# Altium PCB NODEMCU_DEVKIT_V1.0.PcbDoc
Units mil, origin at the board's own origin, x right, y up, seen from the top; angles counter-clockwise.
Board outline 1000 x 1900 mil, 2 copper layers (Top Layer, Bottom Layer); 34 components, 41 nets, 160 pads, 243 vias.
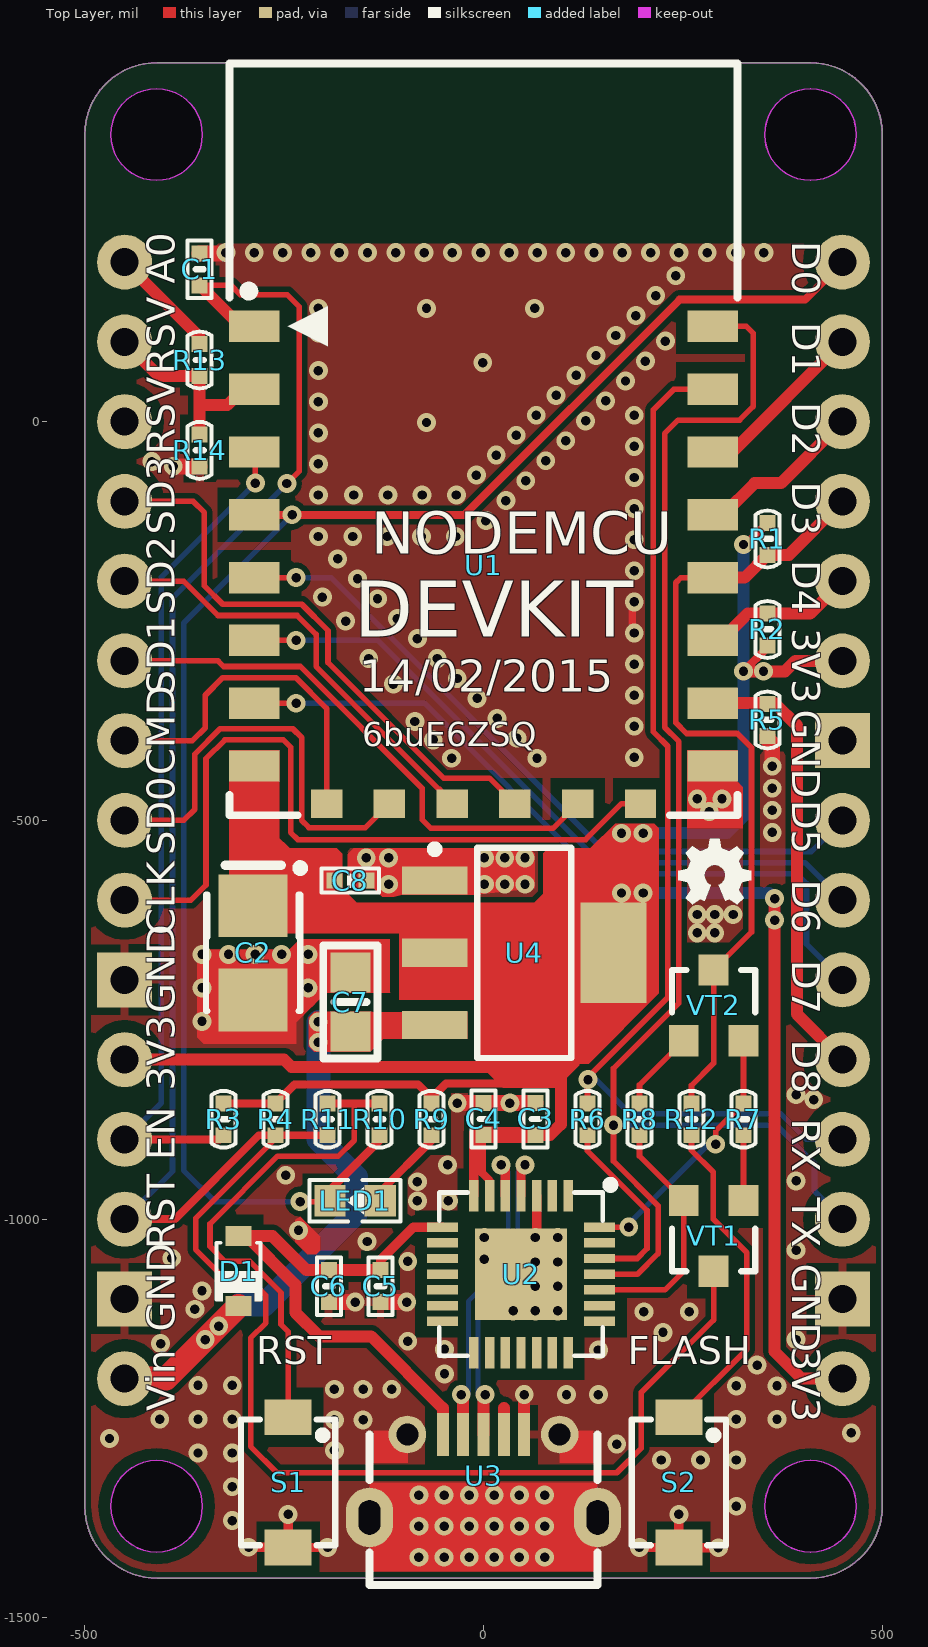
[diagram p0: Top Layer view]
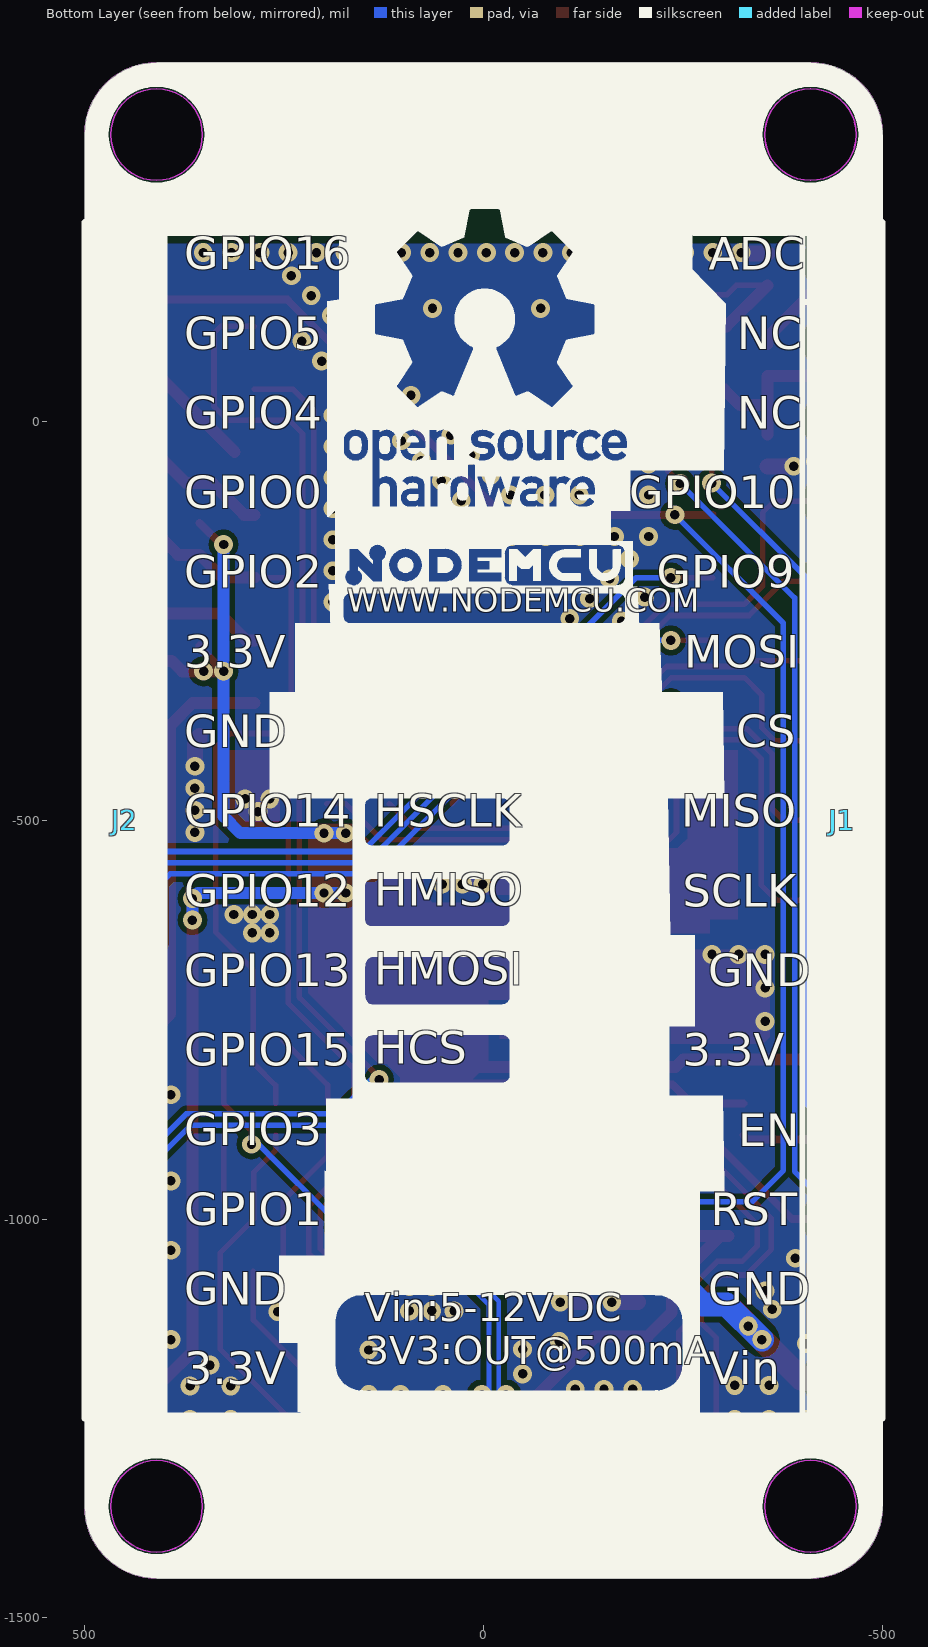
[diagram p1: Bottom Layer view, seen from below]

## Layer stack, top to bottom
Top Solder: solder mask 0.4, Solder Resist, Dk 3.5
Top Layer: signal copper 1.4
Dielectric 1: dielectric 12.6, FR-4, Dk 4.8
Bottom Layer: signal copper 1.4
Bottom Solder: solder mask 0.4, Solder Resist, Dk 3.5

## Board outline
-500,-1360 -500,360 cw(c-410,360) -410,450 410,450 cw(c410,360) 500,360 500,-1360 cw(c410,-1360) 410,-1450 -410,-1450 cw(c-410,-1360)

## Design rules (kind name [scope] priority, off if disabled: settings)
Clearance Clearance_Polygon [InNamedPolygon('Bottom Layer-GND') Or InNamedPolygon('Top Layer-GND') vs IsPad] p1: gap=15 ignorepadtopadclearanceinfootprint=FALSE except(0: Arc-Hole Track-Hole SMDPad-Hole THPad-Hole Via-Hole Fill-Hole Poly-Hole Region-Hole Text-Hole)
Clearance Clearance_Diff [InNet('D_N') vs InNet('D_P')] p2: gap=6 ignorepadtopadclearanceinfootprint=FALSE except(0: Arc-Hole Track-Hole SMDPad-Hole THPad-Hole Via-Hole Fill-Hole Poly-Hole Region-Hole Text-Hole)
Clearance [All] p3: gap=7 ignorepadtopadclearanceinfootprint=FALSE except(0: Arc-Hole Track-Hole SMDPad-Hole THPad-Hole Via-Hole Fill-Hole Poly-Hole Region-Hole Text-Hole)
DiffPairsRouting [All] p1: maxlimit=10 minlimit=6 mostfreqgap=6 toplayer_minwidth=6 toplayer_maxwidth=100 toplayer_prefwidth=6 bottomlayer_minwidth=6 bottomlayer_maxwidth=100 bottomlayer_prefwidth=6 maxuncoupledlength=500
HoleSize [All] p1: absolutevalues=TRUE maxlimit=196.85 minlimit=11.81 maxpercent=80.000 minpercent=20.000
PolygonConnect PolygonConnect_USB [InComponent('U3')And IsPadHoleValid] p1: connectstyle=Direct reliefconductorwidth=10 reliefentries=4 polygonreliefangle="90 Angle" airgapwidth=10
PolygonConnect PolygonConnect_Via [IsVia] p2: connectstyle=Direct reliefconductorwidth=10 reliefentries=4 polygonreliefangle="90 Angle" airgapwidth=10
PolygonConnect [All] p3: connectstyle=Relief reliefconductorwidth=10 reliefentries=4 polygonreliefangle="90 Angle" airgapwidth=10
RoutingVias [All] p1: holewidth=28 width=50 viastyle="Through Hole" minholewidth=28 minwidth=50 maxholewidth=28 maxwidth=50
SilkToBoardRegionClearance [All] p1 off:
SilkToSilkClearance [All] p1 off: silktosilkclearance=10
SilkToSolderMaskClearance [IsPad] p1 off: minsilkscreentomaskgap=10 clearancetoexposedcopper=TRUE
SolderMaskExpansion [All] p1: expansion=4
Width [All] p1: maxlimit=300 minlimit=7 preferedwidth=10
25 further rules are at their usual default settings.

## Classes and differential pairs
component class 07_ADC: R13 R14
component class 06_KEY: LED1 R9 R10 R11 R12 S1 S2
component class 05_IO_CONN: J1 J2
component class 04_POWER: C7 C8 D1 U4
component class 02_ESP12_CORE: C1 C2 R1 R2 R3 R4 R5 U1
component class 03_USB_TO_UART: C3 C4 C5 C6 R6 R7 R8 U2 U3 VT1 VT2
differential pair D: +D_P -D_N

## Components (designator, comment, footprint, x,y, rotation, side; value= is the part's Value field where it differs from the comment)
C1 "100nF" SMT_C_0402 -356,191 r90 top
C2 "100uF TAJB107M006RNJ" SMT_C_Tantalum_B -289,-666 r270 top
C3 "10uF" SMT_C_0402 65.19,-874.38 r90 top
C4 "100nF" SMT_C_0402 0,-874.38 r90 top
C5 "10uF" SMT_C_0402 -129.2,-1084 r270 top
C6 "100nF" SMT_C_0402 -193.8,-1084 r270 top
C7 "10uF 25V" SMT_C_0805 -167,-727.81 r90 top
C8 "10uF" SMT_C_0402 -167,-575.45 r0 top
D1 "1N5819/SS14/S4(SOD_323)" SMT_DIODE_SOD_323 -307,-1065 r270 top
J1 "THT_Male_P_1x15" THT_Male_P_1x15-2.54mm#1 -450,200 r180 bottom locked
J2 "THT_Male_P_1x15" THT_Male_P_1x15-2.54mm#2 450,200 r180 bottom locked
LED1 "BLUE" SMT_LED_0603 -161,-977 r180 top
R1 "12k" SMT_R_0402 356,-147 r270 top
R2 "12k" SMT_R_0402 356,-260.5 r90 top
R3 "12k" SMT_R_0402 -325.93,-874.76 r270 top
R4 "12k" SMT_R_0402 -260.75,-874.76 r270 top
R5 "12k" SMT_R_0402 356,-374 r90 top
R6 "470" SMT_R_0402 130.37,-874.76 r90 top
R7 "12k" SMT_R_0402 325.93,-874.76 r90 top
R8 "12k" SMT_R_0402 195.56,-874.76 r270 top
R9 "470" SMT_R_0402 -65.19,-874.76 r90 top
R10 "0(NC)" SMT_R_0402 -130.37,-874.76 r270 top
R11 "470" SMT_R_0402 -195.56,-874.76 r270 top
R12 "470" SMT_R_0402 260.75,-874.76 r90 top
R13 "220k(1%)" SMT_R_0402 -356,77.31 r90 top
R14 "100k(1%)" SMT_R_0402 -356,-36 r90 top
S1 "KEY_RST/USER" SMT_SW_PTS_820 -245,-1330 r270 top locked
S2 "KEY_FLASH" SMT_SW_PTS_820 245,-1330 r270 top locked
U1 "ESP_12_E" ESP_12_E_L -314.96,119.43 r0 top locked
U2 "CP2102" CP2102 47,-1069 r270 top locked
U3 "USB_Micro_5S_B" USB_MICRO_5S_B 0,-1270 r180 top locked
U4 "NCP1117ST33T3G" SOT-223 51,-666 r180 top
VT1 "S8050" SMT_TRIODE_NPN 288.53,-1020.87 r180 top
VT2 "S8050" SMT_TRIODE_NPN 288.53,-731.83 r0 top

## Footprints (in the part's own frame and the unit in brackets; to place one, negate y for a bottom-side part, rotate by r counter-clockwise, add the part's x,y. Pads: shape width x height; smd on the part's side, far side on the other; paste and mask are expansions set on the pad)
CP2102 [mm] "CP2102"
  rect 1x0.3 smd: 1(-2.5,1.5) 2(-2.5,1) 3(-2.5,0.5) 4(-2.5,0) 5(-2.5,-0.5) 6(-2.5,-1) 7(-2.5,-1.5) 15(2.5,-1.5) 16(2.5,-1) 17(2.5,-0.5) 18(2.5,0) 19(2.5,0.5) 20(2.5,1) 21(2.5,1.5)
  rect 0.3x1 smd: 8(-1.5,-2.5) 9(-1,-2.5) 10(-0.5,-2.5) 11(0,-2.5) 12(0.5,-2.5) 13(1,-2.5) 14(1.5,-2.5) 22(1.5,2.5) 23(1,2.5) 24(0.5,2.5) 25(0,2.5) 26(-0.5,2.5) 27(-1,2.5) 28(-1.5,2.5)
  rect 2.921x2.921 smd paste-3.2: 29(0,0)
  silkscreen extent -2.97,-2.6 2.6,2.97, body extent -2.5,-2.5 2.5,2.5, height 1
ESP_12_E_L [mm] "ESP-12 Wi-Fi Module by AI-Thinker"
  rect 1.6x1 smd: 1(0.7,0) 2(0.7,-2) 3(0.7,-4) 4(0.7,-6) 5(0.7,-8) 6(0.7,-10) 7(0.7,-12) 8(0.7,-14) 15(15.3,-14) 16(15.3,-12) 17(15.3,-10) 18(15.3,-8) 19(15.3,-6) 20(15.3,-4) 21(15.3,-2) 22(15.3,0)
  rect 1x0.9 smd: 9(3,-15.2) 10(5,-15.2) 11(7,-15.2) 12(9,-15.2) 13(11,-15.2) 14(13,-15.2)
  silkscreen extent -0.08,-15.57 16.08,8.37, body extent 0,-15.49 16,8.51, height 2.75
SMT_C_0402 [mil] "Surface mount capacitor 0402"
  rect 20x20 smd: 1(-20,0) 2(20,0)
  silkscreen extent -36,-15 36,15, body extent -20,-10 20,10, height 20
SMT_C_0805 [mil] "Surface mount capacitor 0805"
  rect 50x50 smd: 1(-37,0) 2(37,0)
  silkscreen extent -71,-34 71,34, body extent -49,-24 49,25, height 31
SMT_C_Tantalum_B [mm] "Capacitor, SM Tantalum; Body 3.5 x 2.8 mm (LxW typ)"
  rect 2x2.2 smd: 1(-1.5,0) 2(1.5,0)
  silkscreen extent -2.82,-1.5 1.85,1.63, body extent -1.75,-1.4 1.75,1.4, height 1.9
SMT_DIODE_SOD_323 [mm] "SOD-323(0805) Package"
  rect 0.63x0.83 smd: 1(-1.115,0) 2(1.115,0)
  silkscreen extent -0.9,-0.7 0.96,0.7, body extent -1.35,-0.62 1.35,0.62, height 1.1
SMT_LED_0603 [mm] "SMT LED"
  rect 1x1 smd: 1(-0.8,0) 2(0.8,0)
  silkscreen extent -1.45,-0.66 1.45,0.66, body extent -0.81,-0.4 0.81,0.4, height 0.6
SMT_R_0402 [mil] "Surface mount resistor 0402"
  rect 20x20 smd: 1(-20,0) 2(20,0)
  silkscreen extent -36,-15 36,15, body extent -20,-10 20,10, height 20
SMT_SW_PTS_820 [mm] "SMT Tactile ?Switch PTS 820 Series"
  rect 1.143x1.5 smd: 1(-2.075,0) 2(2.075,0)
  round 0 all layers, no hole paste-2.54 mask-2.54: MH1(0,0.9) MH2(0,-0.9)
  silkscreen extent -2,-1.5 2,1.5, body extent -2.25,-1.55 2.25,1.55, height 2.05
SMT_TRIODE_NPN [mm] "Surface mount NPN transistor, package SOT-23"
  rect 0.95x1 smd: 1(-0.95,-1.125) 2(0.95,-1.125) 3(0,1.125)
  silkscreen extent -1.33,-0.22 1.32,1.13, body extent -1.45,-1.4 1.45,1.4, height 1.3
SOT-223 [mm] "3 LEAD SOT-223 PLASTIC PACKAGE"
  rect 2.1x0.9 smd: 1(2.85,-2.3) 2(2.85,0) 3(2.85,2.3)
  rect 2.1x3.2 smd: 2(-2.85,0)
  silkscreen extent -1.5,-3.42 2.97,3.35, body extent -3.54,-3.25 3.54,3.25, height 1.65
THT_Male_P_1x15-2.54mm#1 [mil] "THT Male pin header strip 1x15 2.54mm pitch"
  round 69 hole 35: 1(0,0) 2(0,-100) 3(0,-200) 4(0,-300) 5(0,-400) 6(0,-500) 7(0,-600) 8(0,-700) 9(0,-800) 11(0,-1000) 12(0,-1100) 13(0,-1200) 15(0,-1400)
  rect 69x69 hole 35: 10(0,-900) 14(0,-1300)
  silkscreen extent -50,-1450 50,50, body extent -57,-1450 57,50, height 335
THT_Male_P_1x15-2.54mm#2 [mil] "THT Male pin header strip 1x15 2.54mm pitch"
  round 69 hole 35: 1(0,0) 2(0,-100) 3(0,-200) 4(0,-300) 5(0,-400) 6(0,-500) 8(0,-700) 9(0,-800) 10(0,-900) 11(0,-1000) 12(0,-1100) 13(0,-1200) 15(0,-1400)
  rect 69x69 hole 35: 7(0,-600) 14(0,-1300)
  silkscreen extent -50,-1450 50,50, body extent -57,-1450 57,50, height 335
USB_MICRO_5S_B [mil] "USB Micro SMT 5S B"
  rect 15x54 smd: 1(51,0) 2(25.5,0) 3(0,0) 4(-25.5,0) 5(-51,0)
  oval 59.06x74.8 hole 27.56 slot 43.31 at 90 deg: 6(-143,104) 7(143,104)
  round 47.24 hole 27.5: 8(95.5,0) 9(-95.5,0)
  silkscreen extent -143,0 143,189, body extent -161,-9 161,204, height 105

## Part data
C1 C3 C4 C5 C6 C8: library part SMT_C_0402, "Surface mount capacitor 0402"
C2: library part SMT_C_Tantalum_B, "Capacitor, SM Tantalum; Body 3.5 x 2.8 mm (LxW typ)"
C7: library part SMT_C_0805, "Surface mount capacitor 0805"
D1: library part SMT_DIODE_SCHOTTKY_SOD_323, "Surface mount schottky diode SOD-323(0805) Package"
J1 J2: "THT Male pin header strip 1x15"
LED1: library part SMT_LED_0603, "SMT LED"
R1 R2 R3 R4 R5 R6 R7 R8 R9 R10 R11 R12 R13 R14: library part SMT_R_0402, "Surface mount resistor 0402"
S1 S2: library part SMT_SW_PTS_820, "SMT Tactile ?Switch PTS 820 Series"
U1: "ESP-12 Wi-Fi Module by AI-Thinker"
U3: "USB micro female SMT with 4 fixed foot"
U4: library part NCP1117, "NCP1117, NCV1117. 1.0 A Low-Dropout Positive  Fixed and Adjustable  Voltage Regulators"
VT1 VT2: library part SMT_TRIODE_NPN, "Surface mount NPN transistor, package SOT-23"

## Free pads (board coordinates)
  round 115 hole 115 unplated paste-300 mask-300: 0(-410,-1360) 0(-410,360) 0(410,-1360) 0(410,360)

## Via types
v1: diameter 23.62, hole 11.81, Top Layer to Bottom Layer, tented both sides, 243 vias

## Nets (pads, with @x,y where several pads share a name; then routed paths per layer and width w, separated by ;. In a path a pad name is that pad's centre, name@x,y a point inside that pad or via, vN(x,y) a via of type N, cw(c..) or ccw(c..) an arc to the next point about the centre after c; other vN are vias at no path point)
ACTIVE: U2.11
ADC: J1.2 R13.1 R14.2 U1.2 | length 258.9
  Top Layer w15: J1.2 -407.31,57.31 R13.1 R14.2 ; -353,20.66 -321.34,20.66 -301.32,40.69 U1.2
ADC_EX: J1.1 R13.2 | length 141.6
  Top Layer w15: J1.1 -356,106 R13.2
CTS: U2.23
D_N: U2.5 U3.2 | length 409.7
  Top Layer w6: v1(22,-932) v1@27.32,-937.32
  Top Layer w11.81: U2.5 v1@27.32,-937.32
  Top Layer w15: U3.2 v1@-25.5,-1222.5
  Bottom Layer w6: v1(-28,-1220) -19,-1220 -19,-1103.03 31,-1053.03 31,-941 v1(22,-932)
D_P: U2.4 U3.3 | length 410.1
  Top Layer w6: v1@47,-937 v1(52,-932)
  Top Layer w11.81: U2.4 v1@47,-937
  Top Layer w15: U3.3 v1@0,-1222
  Bottom Layer w6: v1(2,-1220) -7,-1220 -7,-1108 43,-1058 43,-941 v1(52,-932)
DCD: U2.1
DSR: U2.27
DTR: R7.2 U2.28 VT2.2 | length 335.3
  Top Layer w7: U2.28 v1@182,-1009.95 ; v1(291,-906) 291,-889.69 R7.2 VT2.2
  Bottom Layer w7: v1(182,-1010) 182,-1006 282,-906 v1(291,-906)
EN: J1.12 R3.2 U1.3 | length 1054.7
  Top Layer w7: v1(-286,-77) U1.3@-286,-39.46
  Top Layer w10: J1.12 -331.18,-900 R3.2
  Bottom Layer w7: J1.12 -404,-854 -404,-195 v1(-286,-77)
GND: C1.2 C2.2 C3.2 C4.2 C5.2 C6.2 C7.2 C8.2 J1.10 J1.14 J2.7 J2.14 R5.1 R14.1 S1.2 S2.2 U1.15 U2.3 U2.29 U3.5 U3.6 U3.7 U3.8 U3.9 U4.1 | length 848.1
  Top Layer w11.81: v1(-294.53,-1411.39) S1.2@-245,-1411.39 ; v1(-245,-1370.17) S1.2 v1(-195.47,-1411.69) ; U2.29@66.69,-1049.32 U2.3 ; v1(195.47,-1411.69) S2.2 v1(245,-1370.17) ; S2.2@245,-1412 v1(294.53,-1412) ; v1(268,-473) U1.15@268,-433 ; v1(283,-489) 283,-436.16 U1.15 ; v1(299,-473) U1.15@299,-433
  Top Layer w15: U3.5 v1(51,-1220)
  Top Layer w20: v1(-389,-56) R14.1 ; C1.2 v1@-323,211 ; C6.2 v1(-160.8,-1104) ; C8.2 v1(-147,-547) ; C5.2 v1(-96.2,-1104) ; v1(-33,-854.38) C4.2 C3.2 ; R5.1 356,-398 362,-404 v1(362,-432)
  other v1: -81,-1424 -49.5,-1424 -18,-1424 13.5,-1424 45,-1424 76.5,-1424 -81,-1385 -49.5,-1385 -18,-1385 13.5,-1385 45,-1385 76.5,-1385 -315,-1378 317,-1360 -81,-1346 -49.5,-1346 -18,-1346 13.5,-1346 45,-1346 76.5,-1346 -315,-1335.6 223,-1302 272,-1302 317,-1302 -358,-1293.2 -315,-1293.2 -187,-1290 167,-1282 -469,-1275 461,-1268 -187,-1251.67 -151,-1251.67 -406,-1250.8 -358,-1250.8 -315,-1250.8 317,-1250.8 368,-1250.8 104,-1220 144,-1220 -187,-1213.33 -151,-1213.33 -115,-1213.33 317,-1209 368,-1209 -358,-1208.4 -315,-1208.4 -49,-1194 343,-1183 144,-1164 -49,-1163 -405,-1156 -95,-1153 392,-1151 225,-1142 201,-1116 258,-1116 37,-1115 65,-1115 93,-1115 -362,-1113 -353,-1090 65,-1084.33 93,-1084.33 -95,-1053 65,-1053.67 93,-1053.67 1,-1050 -391,-1049 392,-1039 -146,-1028 1,-1023 65,-1023 93,-1023 -232,-1014 -83,-977 -44,-977 -83,-953 392,-952 -248,-945 -45,-932 33,-854.38 414,-850 392,-844 -353,-752 -353,-710 -220,-710 -353,-668 -319.75,-668 -286.5,-668 -253.25,-668 -220,-668 268,-641 290,-641 268,-618 290,-618 313,-618 -119,-580 1,-580 26.5,-580 52,-580 -119,-547 1,-547 26.5,-547 52,-547 362,-515 362,-487.33 362,-459.67 -40,-422 67,-422 189,-421 -63,-399 42,-397 189,-382 -86,-376 17,-372 -8,-347 189,-343 -113,-329 -33,-322 189,-304 -144,-297 -58,-297 -83,-272 189,-265 -173,-250 -108,-247 189,-226 -133,-222 -202,-220 -158,-197 189,-187 -183,-172 189,-148 -207,-144 -164,-144 -121,-144 -78,-144 -35,-144 3,-124 189,-109 28,-99 -207,-92 -163,-92 -120,-92 -77,-92 -34,-92 53,-74 189,-70 -9,-67 -207,-53 -416,-50 78,-49 16,-42 189,-31 103,-24 41,-17 -207,-14 -71.5,-1 128,1 66,8 189,8 -207,25 153,26 91,33 178,51 116,58 -207,64 -1,74 203,76 141,83 228,101 166,108 -207,111 191,133 -207,142 -71.5,142 64,142 216,158 241,183 -323,212 -287.5,212 -252,212 -216.5,212 -181,212 -145.5,212 -110,212 -74.5,212 -39,212 -3.5,212 32,212 67.5,212 103,212 138.5,212 174,212 209.5,212 245,212 280.5,212 316,212 351.5,212
GPIO0: J2.4 R1.2 R12.2 U1.18 VT2.3 | length 1011.8
  Top Layer w7: R12.2 260.75,-832.25 288.53,-804.47 VT2.3 336,-640.07 336,-408.85 318.15,-391 254.6,-391 241,-377.4 241,-202 247.46,-195.54 U1.18
  Top Layer w15: U1.18 327.46,-195.54 R1.2 383,-167 J2.4
GPIO2: J2.5 R2.2 U1.17 | length 193.4
  Top Layer w15: U1.17 297.72,-274.28 331.5,-240.5 R2.2 409.5,-240.5 J2.5
GPIO4: J2.3 U1.19 | length 211
  Top Layer w15: U1.19 300.2,-116.8 340,-77 373,-77 J2.3
GPIO5: J2.2 U1.20 | length 195.2
  Top Layer w15: U1.20@311.94,-38.06 J2.2
GPIO9: J1.5 U1.11 | length 551
  Top Layer w7: J1.5 -376,-200 -333,-243 -233.8,-243 -210,-266.8 -210,-306.8 -55.8,-461 -55,-461 -39.37,-476.63 U1.11
GPIO10: J1.4 U1.12 | length 723.7
  Top Layer w7: J1.4 -364,-100 -350,-114 -350,-206 -327,-229 -228,-229 -195,-262 -195,-302 -50,-447 7.37,-447 U1.12
GPIO12: J2.9 U1.6 | length 872.3
  Top Layer w7: U1.6 v1(-235,-274.28)
  Bottom Layer w7: v1(-235,-274.28) -132.52,-274.28 146.2,-553 403,-553 J2.9
GPIO13: J2.10 U1.7 | length 925.6
  Top Layer w7: U1.7 v1(-235,-353.02)
  Bottom Layer w7: v1(-235,-353.02) -73.98,-353.02 140,-567 393,-567 405,-579 405,-655 J2.10
GPIO14: J2.8 U1.5 | length 895.8
  Top Layer w7: U1.5 v1(-235,-195.54)
  Bottom Layer w7: v1(-235,-195.54) -191.46,-195.54 152,-539 411,-539 J2.8
GPIO15: J2.11 R5.2 U1.16 | length 559.8
  Top Layer w15: U1.16 365.02,-353.02 393,-381 393,-743 J2.11
GPIO16: J2.1 LED1.2 R10.2 U1.4 | length 2053.8
  Top Layer w7: v1(-230,-978) LED1.2@-193.5,-978
  Top Layer w10: U1.4 v1(-240,-116.8) -23.8,-116.8 246,153 403,153 J2.1 ; LED1.2 -192.5,-963.5 -130.37,-901.37 R10.2
  Bottom Layer w7: v1(-240,-116.8) -376,-252.8 -376,-939 -337,-978 v1(-230,-978)
NetLED1_1: LED1.1 R9.1 | length 108.9
  Top Layer w10: LED1.1 -129.5,-965.5 -65.19,-901.19 R9.1
NetR6_1: R6.1 U2.26 | length 237.8
  Top Layer w7: R6.1 130.37,-914.37 205,-989 205,-1037 192.68,-1049.32 U2.26
NetR7_1: R7.1 VT1.1 | length 81.8
  Top Layer w7: VT1.1 R7.1
NetR8_1: R8.1 VT2.1 | length 101.7
  Top Layer w7: R8.1 195.56,-831.69 VT2.1
NetR10_1: R10.1 R11.1 S1.1 | length 637.5
  Top Layer w7: S1.1 -245,-1141 -254,-1132 -254,-1092 -293,-1053 -324,-1053 -343,-1034 -343,-1005.8 -258.2,-921 -182,-921 -162,-901 -162,-854.76
  Top Layer w10: R11.1 R10.1@-130,-854.76
NetR12_1: R12.1 S2.1 | length 417.4
  Top Layer w7: S2.1 330,-1163.31 330,-1042 288,-1000 288,-941 260.75,-913.75 R12.1
NRST: C1.1 J1.13 R4.2 R11.2 U1.1 VT1.3 | length 3028.4
  Top Layer w7: C1.1 -317,171 -305,159 -246,159 -231,144 -231,-62 v1(-246.5,-77.5) ; R4.2 -260.75,-898.75 -361,-999 -361,-1038 -329,-1070 -299,-1070 -273,-1096 -273,-1130 -292,-1149 -292,-1285 -259,-1318 167,-1318 198,-1287 198,-1217 288.53,-1126.47 VT1.3
  Top Layer w10: J1.13 -387,-1000 -281.76,-894.76 R4.2 R11.2
  Top Layer w15: C1.1 -304.43,119.43 U1.1
  Bottom Layer w7: J1.13 -390,-940 -390,-221 v1(-246.5,-77.5)
OTG_ID: U3.4 | length 33
  Top Layer w15: U3.4 25.5,-1237
RI: U2.2
RTS: R8.2 U2.24 VT1.2 | length 308.7
  Top Layer w7: U2.24 227.31,-1088.69 251.13,-1064.87 VT1.2 195.56,-921.01 R8.2
RXD0: J2.12 R6.2 U1.21 | length 1354
  Top Layer w7: R6.2 130.37,-822.63 231,-722 231,-407 213,-389 213,15 238.68,40.69 U1.21
  Bottom Layer w7: v1(131,-825) 141,-825 184,-868 372.8,-868 404.8,-900 J2.12
SPI_CLK: J1.9 U1.14 | length 956
  Top Layer w7: J1.9 -367,-600 -348,-581 -348,-422.6 -324.4,-399 -251,-399 -242,-408 -242,-515 -233,-524 128,-524 173,-479 U1.14
SPI_INT: J1.6 U1.13 | length 691
  Top Layer w7: J1.6 -333,-300 -326,-307 -229.66,-307 -77,-459.66 -77,-499 -66,-510 87.11,-510 U1.13
SPI_MISO: J1.8 U1.10 | length 544.7
  Top Layer w7: J1.8 -376,-500 -362,-486 -362,-416.8 -330.2,-385 -239.2,-385 -228,-396.2 -228,-500.1 -219.1,-509 -148.11,-509 U1.10
SPI_MOSI: J1.7 U1.9 | length 445.3
  Top Layer w7: J1.7 -365,-400 -349,-384 -349,-343 -327,-321 -235.46,-321 -196.85,-359.61 U1.9
TXD0: J2.13 U1.22 U2.25 | length 1804.5
  Top Layer w7: U2.25 192.99,-1069.01 219,-1043 219,-983.2 163,-927.2 163,-811.01 245,-729.01 245,-401.2 227,-383.2 227,-15 244,2 321,2 338,19 338,111 329.57,119.43 U1.22
  Bottom Layer w7: v1(163,-882) 367,-882 415,-930 415,-965 J2.13
VDD3V3: C2.1 C3.1 C4.1 C8.1 J1.11 J2.6 J2.15 R1.1 R2.1 R3.1 R4.1 R9.2 U1.8 U2.6 U2.7 U4.2 | length 3554.9
  Top Layer w10: R3.1 R4.1 -236.99,-831 -82,-831 -65.19,-847.81 R9.2 -65.19,-848.19 -47,-830 40,-830 75,-795 75,-695 ; C4.1@-1.81,-894.38 -1.81,-941.86 7.63,-951.3 U2.6 ; v1(326,-313) 356,-283 R2.1 ; v1(326,-154) 329,-154 R1.1
  Top Layer w11.81: U2.7 -12.05,-894.05
  Top Layer w15: J1.11 -250,-800 -241,-809 31,-809 54,-786 54,-689 ; C3.1 83.62,-894.38 97,-881 97,-592 v1(173,-516) v1(200,-516) ; 118,-613 118,-602 129,-591 v1(173,-591) v1(200,-591) ; v1(326,-313) v1(351,-313) 378,-313 391,-300 J2.6 ; v1(365,-598) v1(365,-625) 365,-1166 399,-1200 J2.15
  Top Layer w20: C4.1 C3.1
  Bottom Layer w15: v1(173,-591) v1(200,-591) 358,-591 v1(365,-598) v1(365,-625) ; v1(173,-516) v1(200,-516) 305,-516 326,-495 v1(326,-313) v1(326,-154)
VDD5V: C7.1 D1.2 J1.15 U4.3 | length 694.5
  Top Layer w30: J1.15 -398.1,-1200 D1.2
  Bottom Layer w30: v1(-349,-1151) -304.88,-1106.88 -274.88,-1106.88 -160,-992 -160,-947 -207.19,-899.81 v1(-207.19,-778.19) v1(-207.19,-752.61)
  other v1: -332,-1134
VDDUSB: C5.1 C6.1 D1.1 U2.8 U3.1 | length 702.2
  Top Layer w11.81: C5.1 -129.2,-1051.2 -87.95,-1009.95 U2.8
  Top Layer w15: C5.1 C6.1 -222,-1064 -264.9,-1021.1 D1.1 -296.9,-1021.1 -236,-1082 -236,-1117 -206,-1147 -141,-1147 -51,-1237 U3.1
pads on no net: J1.3 S1.MH1 S1.MH2 S2.MH1 S2.MH2 U2.9 U2.10 U2.12 U2.13 U2.14 U2.15 U2.16 U2.17 U2.18 U2.19 U2.20 U2.21 U2.22

## Polygon pours and split planes (outlines as drawn)
GND on Bottom Layer "Bottom Layer-GND" (solid, remove dead copper, pour order 4): -500,223 -500,-1450 500,-1450 500,223
GND on Top Layer "Top Layer-GND" (solid, remove dead copper, pour order 3): -500,223 -500,-1450 500,-1450 500,223

## Keep-outs
Keep-Out Layer:
  circle w2: c-410,360 r57.5
  circle w2: c410,360 r57.5
  circle w2: c410,-1360 r57.5
  circle w2: c-410,-1360 r57.5
  lines w2: 270,450 410,450 ; 410,450 cw(c410,360) 500,360 500,-1360 cw(c410,-1360) 410,-1450 -410,-1450 cw(c-410,-1360) -500,-1360 -500,360 cw(c-410,360) -410,450 410,450

## Other copper
Top Layer:
  rectangle net GND: -143,-1442 143,-1330
  rectangle net GND: -138,-1306 -95,-1265
  rectangle net GND: 95,-1306 138,-1265
  rectangle net VDD3V3: -319,-624 -256,-412
  rectangle net VDD5V: -191,-774 -20,-740
  rectangle net VDD3V3: -106,-725 205,-607
  rectangle net VDD3V3: -284,-642 82,-603
  rectangle net VDD3V3: -197,-624 -177,-565
  region net GND: 255.71,-412 255.71,-510 325.29,-510 325.29,-458.29 318,-451 319,-450 319,-412
  region net GND: -163,-585 -170,-578 -170,-542.14 -162.86,-535 57,-535 64,-542 64,-585 -9,-593 -102,-593 -112,-596 -127,-596 -137.45,-585
  pour cut-out: -225.59,-744.27 -196.78,-715.46 -117.54,-715.46 -117.54,-649.14 -117.41,-649 -107,-649 -107,-739 -108,-740 -212,-740
  region net GND: -359,-662 -243.56,-662 -230.69,-649.14 -117.54,-649.14 -117.54,-715.46 -117,-716 -198,-716 -235,-753 -235,-780 -351,-780 -359,-772
  region net VDD3V3: -18,-900 -18,-890 -12,-884 12,-884 12,-900
  region net VDD5V: -142,-790 -212,-790 -219,-783 -219,-747 -212,-740 -139.25,-740 -124.23,-772.23
  region net VDD3V3: 60,-607 75,-592 75,-541 81,-535 134,-535 165,-504 214,-504 220,-510 220,-717 132,-805 120,-805 120,-807 92,-835 24,-835 -6,-805 -6,-607
  region net VDD3V3: -271,-519 -259,-519 -243,-535 -184,-535 -177,-542 -177,-585 -150,-612 -150,-636 -245,-636 -271,-610
  region net GND: -230,-997.18 -205,-1022.18 -205,-1039 -210,-1044 -221.09,-1044 -236,-1029.09 -236,-1001
Multi-Layer:
  region net GND: 182,-219 182,-254 191,-254 191,-218

## Silkscreen, mask and mechanical layers (free items; w line width, h text height)
Top Overlay:
  region: 296.02,-523.41 296.16,-523.75 296.15,-523.75 298.25,-534.72 298.39,-535.06 298.62,-535.15 307.81,-538.96 308.04,-539.05 308.37,-538.91 308.37,-538.9 317.61,-532.63 317.95,-532.49 318.4,-532.68 318.37,-532.71 326.31,-540.59 326.5,-541.04 326.36,-541.38 326.35,-541.37 320.08,-550.62 319.94,-550.96 320.03,-551.18 323.84,-560.37 323.93,-560.6 324.27,-560.74 324.27,-560.73 335.25,-562.83 335.58,-562.97 335.77,-563.42 335.72,-563.42 335.77,-574.6 335.58,-575.06 335.25,-575.2 335.24,-575.18 324.27,-577.29 323.93,-577.43 323.84,-577.66 320.03,-586.85 319.94,-587.07 320.08,-587.41 320.09,-587.4 326.36,-596.65 326.5,-596.99 326.31,-597.44 326.28,-597.41 318.4,-605.35 317.95,-605.53 317.61,-605.39 317.62,-605.38 308.37,-599.11 308.04,-598.97 307.81,-599.07 303.6,-600.81 303.38,-600.9 302.92,-600.72 302.83,-600.49 295.08,-581.51 294.99,-581.29 295.18,-580.84 295.38,-580.75 295.45,-580.9 299.29,-578.33 302.15,-574.06 303.15,-569.01 302.15,-563.97 299.29,-559.7 295.02,-556.84 289.98,-555.84 284.93,-556.84 280.66,-559.7 277.8,-563.97 276.8,-569.01 277.8,-574.06 280.66,-578.33 284.51,-580.9 284.57,-580.75 284.78,-580.84 284.97,-581.29 284.87,-581.51 277.13,-600.49 277.03,-600.72 276.58,-600.9 276.35,-600.81 272.15,-599.07 271.92,-598.97 271.58,-599.11 271.59,-599.12 262.34,-605.39 262,-605.53 261.55,-605.35 261.58,-605.31 253.64,-597.44 253.46,-596.99 253.6,-596.65 253.61,-596.66 259.88,-587.41 260.02,-587.07 259.92,-586.85 256.12,-577.66 256.02,-577.43 255.69,-577.29 255.68,-577.3 244.71,-575.2 244.37,-575.06 244.18,-574.6 244.23,-574.6 244.18,-563.42 244.37,-562.97 244.71,-562.83 244.71,-562.84 255.69,-560.74 256.02,-560.6 256.12,-560.37 259.92,-551.18 260.02,-550.96 259.88,-550.62 259.87,-550.62 253.6,-541.38 253.46,-541.04 253.64,-540.59 253.68,-540.62 261.55,-532.68 262,-532.49 262.34,-532.63 262.33,-532.64 271.58,-538.91 271.92,-539.05 272.15,-538.96 281.34,-535.15 281.56,-535.06 281.7,-534.72 281.69,-534.72 283.79,-523.75 283.93,-523.41 284.39,-523.22 284.39,-523.27 295.57,-523.22
  text "D0" at 375,226 h60 r270
  text "A0" at -375,173 h60 r90
  text "D1" at 375,124.65 h60 r270
  text "RSV" at -375,59 h60 r90
  text "D2" at 375,24.42 h60 r270
  text "RSV" at -375,-41.43 h60 r90
  text "D3" at 375,-75.58 h60 r270
  text "SD3" at -375,-141.86 h60 r90
  text "D4" at 375,-174 h60 r270
  text "NODEMCU" at -141,-183 h90
  text "SD2" at -375,-242.29 h60 r90
  text "3V3" at 375,-259.01 h60 r270
  text "DEVKIT" at -162,-293 h120
  text "SD1" at -375,-342.71 h60 r90
  text "14/02/2015" at -156,-352 h69
  text "GND" at 375,-361 h60 r270
  text "6buE6ZSQ" at -152,-407 h30
  text "CMD" at -375,-443.14 h60 r90
  text "D5" at 375,-475 h60 r270
  text "SD0" at -375,-543.57 h60 r90
  text "D6" at 375,-574.12 h60 r270
  text "CLK" at -375,-644 h60 r90
  text "D7" at 375,-675.23 h60 r270
  text "GND" at -375,-742 h60 r90
  text "D8" at 375,-775.11 h60 r270
  text "3V3" at -375,-839 h60 r90
  text "RX" at 375,-874.06 h60 r270
  text "EN" at -375,-926 h60 r90
  text "TX" at 375,-973 h60 r270
  text "RST" at -375,-1038 h60 r90
  text "GND" at 375,-1056.2 h60 r270
  text "GND" at -375,-1141 h60 r90
  text "3V3" at 375,-1160 h60 r270
  text "RST" at -285,-1194 h60
  text "FLASH" at 181,-1194 h60
  text "Vin" at -375,-1241 h60 r90
Bottom Overlay:
  drawing of 68 lines, arcs and shapes, not listed
  text "ADC" at -282.31,177 h70
  text "GPIO16" at 375,177.14 h70
  text "GPIO5" at 375,77.27 h70
  text "NC" at -317.82,77.13 h70
  text "NC" at -317.82,-22.73 h70
  text "GPIO4" at 375,-22.6 h70
  text "GPIO10" at -183,-122.46 h70
  text "GPIO0" at 375,-122.46 h70
  text "GPIO9" at -217.35,-222.33 h70
  text "GPIO2" at 375,-222.33 h70
  text "WWW.NODEMCU.COM" at 171,-248 h49
  text "MOSI" at -251.44,-322.2 h70
  text "3.3V" at 375,-322.2 h70
  text "CS" at -317.07,-422.06 h70
  text "GND" at 375,-422.06 h70
  text "MISO" at -248.16,-521.93 h70
  text "HSCLK" at 137,-522 h70
  text "GPIO14" at 375,-521.93 h70
  text "SCLK" at -249.73,-621.8 h70
  text "HMISO" at 137,-621 h70
  text "GPIO12" at 375,-621.8 h70
  text "HMOSI" at 137,-720 h70
  text "GND" at -281.56,-721.67 h70
  text "GPIO13" at 375,-721.67 h70
  text "HCS" at 137,-819 h70
  text "3.3V" at -249.93,-821.53 h70
  text "GPIO15" at 375,-821.53 h70
  text "GPIO3" at 375,-921.4 h70
  text "EN" at -319.46,-922.08 h70
  text "RST" at -284.7,-1021.27 h70
  text "GPIO1" at 375,-1021.27 h70
  text "GND" at -281.56,-1121.13 h70
  text "GND" at 375,-1121.13 h70
  text "Vin:5-12V DC" at 149,-1140 h60
  text "3V3:OUT@500mA" at 148.94,-1194 h60
  text "Vin" at -282.65,-1221 h70
  text "3.3V" at 375,-1221 h70
Top Paste:
  region: 142,-1337 113,-1337 113,-1412 142,-1412
  rectangle: -142,-1412 -113,-1337
  rectangle: 43.6,-1440 68.6,-1411
  rectangle: 6.2,-1440 31.2,-1411
  rectangle: -31.2,-1440 -6.2,-1411
  rectangle: -68.6,-1440 -43.6,-1411
  rectangle: -106,-1440 -81,-1411
  rectangle: 81,-1440 106,-1411
  rectangle: 43.6,-1395.5 68.6,-1366.5
  rectangle: 43.6,-1351 68.6,-1335
  rectangle: 6.2,-1395.5 31.2,-1366.5
  rectangle: 6.2,-1351 31.2,-1335
  rectangle: -31.2,-1395.5 -6.2,-1366.5
  rectangle: -68.6,-1395.5 -43.6,-1366.5
  rectangle: -106,-1395.5 -81,-1366.5
  rectangle: 81,-1395.5 106,-1366.5
  rectangle: 81,-1351 106,-1335
  rectangle: -106,-1351 -81,-1335
  rectangle: -68.6,-1351 -43.6,-1335
  rectangle: -31.2,-1351 -6.2,-1335
  rectangle: -135,-1303 -98,-1268
  region: 135,-1268 98,-1268 98,-1303 135,-1303
Top Solder:
  rectangle: -143,-1415 143,-1333
  rectangle: -106,-1450 106,-1330
  rectangle: -138,-1306 -95,-1265
  region: 138,-1265 95,-1265 95,-1306 138,-1306
Mechanical 15:
  text "2.5400x4.8260cm" at -491,-1551 h60
Drill Drawing:
  text ".Legend" at 777,-1574 h60

## Text inside footprints (layer, text, board x,y; h text height)
U1: Mechanical 13 "ANTENNA AREA" at -255.96,427.43 h10; Mechanical 13 "CUTOUT POLYGON" at -255.96,407.43 h10